# Altium PCB KUOZHAN.PCBDOC (part 10 of 21)
Units mm, origin at the board's own origin, x right, y up, seen from the top; angles counter-clockwise.
Board outline 165.51 x 116.38 mm, 2 copper layers (Top Layer, Bottom Layer); 171 components, 245 nets, 894 pads, 298 vias.
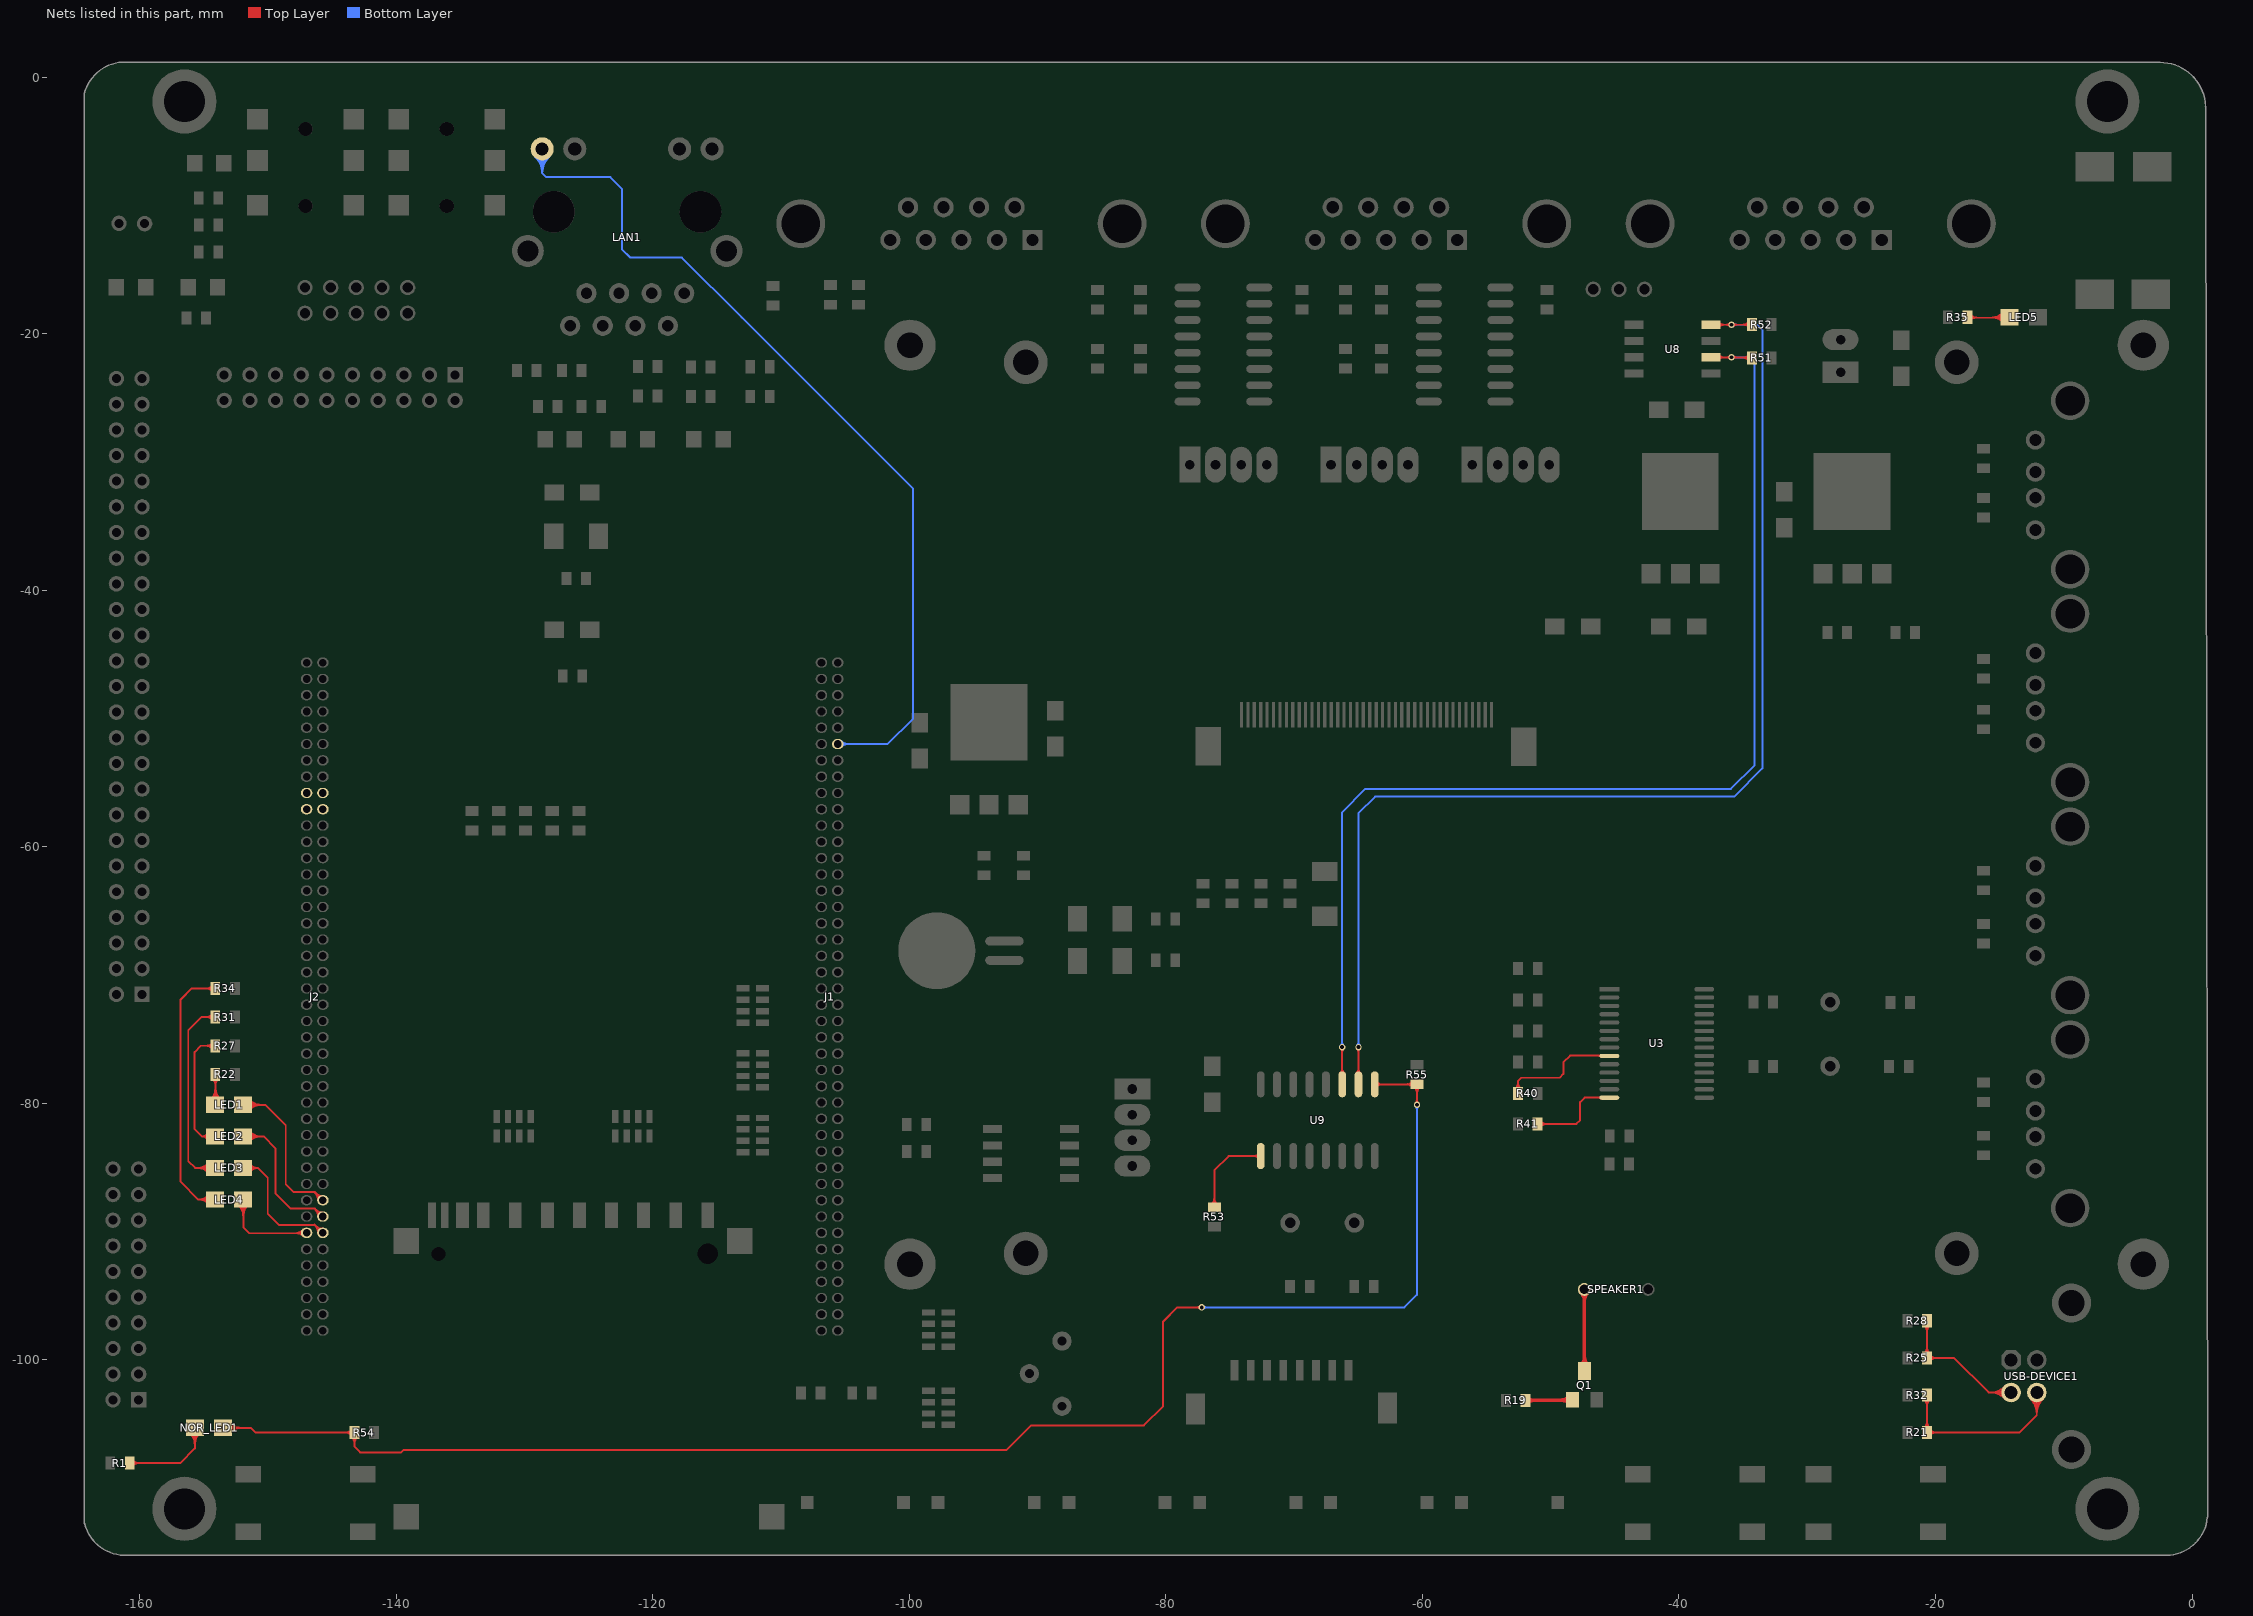
[diagram p10: the nets of this part, all layers, seen from the top]

## Via types
v1: diameter 0.5, hole 0.3, Top Layer to Bottom Layer, 272 vias
v2: diameter 0.6, hole 0.3, Top Layer to Bottom Layer, 24 vias
v3: diameter 0.9, hole 0.9, Top Layer to Bottom Layer, 2 vias

## Nets (pads, with @x,y where several pads share a name; then routed paths per layer and width w, separated by ;. In a path a pad name is that pad's centre, name@x,y a point inside that pad or via, vN(x,y) a via of type N, cw(c..) or ccw(c..) an arc to the next point about the centre after c; other vN are vias at no path point) (continued)
NetLED1_1: LED1.1 R22.1 | length 29.4
  Top Layer w0.15: LED1.1@-154.125,-80.11 -154.087,-80.073 R22.1@-154.087,-77.74 ; LED1.1@-154.456,-79.714 ccw(c-155.345,-78.825) -154.087,-78.825 ; LED1.1@-154.456,-79.714 ccw(c-155.345,-78.825) -154.087,-78.825 ; LED1.1@-154.456,-79.714 ccw(c-155.345,-78.825) -154.087,-78.825 ; LED1.1@-154.456,-79.714 ccw(c-155.345,-78.825) -154.087,-78.825 ; LED1.1@-154.456,-79.714 ccw(c-155.345,-78.825) -154.087,-78.825 ; LED1.1@-154.35,-79.82 ccw(c-154.983,-79.187) -154.087,-79.187 ; LED1.1@-154.35,-79.82 ccw(c-154.983,-79.187) -154.087,-79.187 ; LED1.1@-154.35,-79.82 ccw(c-154.983,-79.187) -154.087,-79.187 ; LED1.1@-154.35,-79.82 ccw(c-154.983,-79.187) -154.087,-79.187 ; LED1.1@-154.35,-79.82 ccw(c-154.983,-79.187) -154.087,-79.187 ; R22.1@-154.304,-78.084 cw(c-154.826,-78.606) -154.087,-78.606 ; R22.1@-154.304,-78.084 cw(c-154.826,-78.606) -154.087,-78.606 ; R22.1@-154.304,-78.084 cw(c-154.826,-78.606) -154.087,-78.606 ; R22.1@-154.304,-78.084 cw(c-154.826,-78.606) -154.087,-78.606 ; R22.1@-154.304,-78.084 cw(c-154.826,-78.606) -154.087,-78.606 ; -154.087,-79.416 ccw(c-153.365,-79.416) LED1.1@-153.876,-79.927 ; -154.087,-79.416 ccw(c-153.365,-79.416) LED1.1@-153.876,-79.927 ; -154.087,-79.416 ccw(c-153.365,-79.416) LED1.1@-153.876,-79.927 ; -154.087,-79.416 ccw(c-153.365,-79.416) LED1.1@-153.876,-79.927 ; -154.087,-79.416 ccw(c-153.365,-79.416) LED1.1@-153.876,-79.927 ; -154.087,-79.054 ccw(c-153.003,-79.054) LED1.1@-153.77,-79.82 ; -154.087,-79.054 ccw(c-153.003,-79.054) LED1.1@-153.77,-79.82 ; -154.087,-79.054 ccw(c-153.003,-79.054) LED1.1@-153.77,-79.82 ; -154.087,-79.054 ccw(c-153.003,-79.054) LED1.1@-153.77,-79.82 ; -154.087,-79.054 ccw(c-153.003,-79.054) LED1.1@-153.77,-79.82 ; -154.087,-78.692 ccw(c-152.641,-78.692) LED1.1@-153.664,-79.714 ; -154.087,-78.692 ccw(c-152.641,-78.692) LED1.1@-153.664,-79.714 ; -154.087,-78.692 ccw(c-152.641,-78.692) LED1.1@-153.664,-79.714 ; -154.087,-78.692 ccw(c-152.641,-78.692) LED1.1@-153.664,-79.714 ; -154.087,-78.692 ccw(c-152.641,-78.692) LED1.1@-153.664,-79.714 ; -154.087,-78.606 cw(c-153.349,-78.606) R22.1@-153.871,-78.084 ; -154.087,-78.606 cw(c-153.349,-78.606) R22.1@-153.871,-78.084 ; -154.087,-78.606 cw(c-153.349,-78.606) R22.1@-153.871,-78.084 ; -154.087,-78.606 cw(c-153.349,-78.606) R22.1@-153.871,-78.084 ; -154.087,-78.606 cw(c-153.349,-78.606) R22.1@-153.871,-78.084
NetLED2_1: LED2.1 R27.1 | length 24.9
  Top Layer w0.15: LED2.1@-154.125,-82.571 -155.129,-82.571 ; R27.1@-154.087,-75.507 -155.207,-75.507 -155.7,-76 -155.7,-82 -155.129,-82.571 ; -155.129,-82.571 cw(c-155.129,-83.079) LED2.1@-154.682,-82.837 ; -155.129,-82.571 ccw(c-155.129,-82.063) LED2.1@-154.682,-82.305 ; -155.129,-82.571 cw(c-155.129,-83.079) LED2.1@-154.682,-82.837 ; -155.129,-82.571 ccw(c-155.129,-82.063) LED2.1@-154.682,-82.305 ; -155.129,-82.571 cw(c-155.129,-83.079) LED2.1@-154.682,-82.837 ; -155.129,-82.571 ccw(c-155.129,-82.063) LED2.1@-154.682,-82.305 ; -155.129,-82.571 cw(c-155.129,-83.079) LED2.1@-154.682,-82.837 ; -155.129,-82.571 ccw(c-155.129,-82.063) LED2.1@-154.682,-82.305 ; -155.129,-82.571 ccw(c-155.129,-82.063) LED2.1@-154.682,-82.305 ; -155.129,-82.571 cw(c-155.129,-83.079) LED2.1@-154.682,-82.837 ; -154.877,-82.571 cw(c-154.877,-82.943) LED2.1@-154.55,-82.766 ; -154.877,-82.571 ccw(c-154.877,-82.199) LED2.1@-154.55,-82.376 ; -154.877,-82.571 cw(c-154.877,-82.943) LED2.1@-154.55,-82.766 ; -154.877,-82.571 ccw(c-154.877,-82.199) LED2.1@-154.55,-82.376 ; -154.877,-82.571 cw(c-154.877,-82.943) LED2.1@-154.55,-82.766 ; -154.877,-82.571 ccw(c-154.877,-82.199) LED2.1@-154.55,-82.376 ; -154.877,-82.571 cw(c-154.877,-82.943) LED2.1@-154.55,-82.766 ; -154.877,-82.571 ccw(c-154.877,-82.199) LED2.1@-154.55,-82.376 ; -154.877,-82.571 ccw(c-154.877,-82.199) LED2.1@-154.55,-82.376 ; -154.877,-82.571 cw(c-154.877,-82.943) LED2.1@-154.55,-82.766 ; -154.826,-75.507 cw(c-154.826,-76.246) R27.1@-154.304,-75.723 ; -154.826,-75.507 ccw(c-154.826,-74.768) R27.1@-154.304,-75.291 ; -154.826,-75.507 cw(c-154.826,-76.246) R27.1@-154.304,-75.723 ; -154.826,-75.507 ccw(c-154.826,-74.768) R27.1@-154.304,-75.291 ; -154.826,-75.507 cw(c-154.826,-76.246) R27.1@-154.304,-75.723 ; -154.826,-75.507 ccw(c-154.826,-74.768) R27.1@-154.304,-75.291 ; -154.826,-75.507 cw(c-154.826,-76.246) R27.1@-154.304,-75.723 ; -154.826,-75.507 ccw(c-154.826,-74.768) R27.1@-154.304,-75.291 ; -154.826,-75.507 ccw(c-154.826,-74.768) R27.1@-154.304,-75.291 ; -154.826,-75.507 cw(c-154.826,-76.246) R27.1@-154.304,-75.723
NetLED3_1: LED3.1 R31.1 | length 39.2
  Top Layer w0.15: LED3.1@-154.125,-85.031 -155.669,-85.031 -156.2,-84.5 -156.2,-74.3 -155.174,-73.274 R31.1@-154.087,-73.274 ; -155.542,-85.031 cw(c-155.542,-86.383) LED3.1@-154.586,-85.427 ; -155.542,-85.031 ccw(c-155.542,-83.68) LED3.1@-154.586,-84.635 ; -155.542,-85.031 cw(c-155.542,-86.383) LED3.1@-154.586,-85.427 ; -155.542,-85.031 ccw(c-155.542,-83.68) LED3.1@-154.586,-84.635 ; -155.542,-85.031 cw(c-155.542,-86.383) LED3.1@-154.586,-85.427 ; -155.542,-85.031 ccw(c-155.542,-83.68) LED3.1@-154.586,-84.635 ; -155.542,-85.031 cw(c-155.542,-86.383) LED3.1@-154.586,-85.427 ; -155.542,-85.031 ccw(c-155.542,-83.68) LED3.1@-154.586,-84.635 ; -155.542,-85.031 ccw(c-155.542,-83.68) LED3.1@-154.586,-84.635 ; -155.542,-85.031 cw(c-155.542,-86.383) LED3.1@-154.586,-85.427 ; -155.18,-85.031 cw(c-155.18,-86.021) LED3.1@-154.48,-85.321 ; -155.18,-85.031 ccw(c-155.18,-84.042) LED3.1@-154.48,-84.742 ; -155.18,-85.031 cw(c-155.18,-86.021) LED3.1@-154.48,-85.321 ; -155.18,-85.031 ccw(c-155.18,-84.042) LED3.1@-154.48,-84.742 ; -155.18,-85.031 cw(c-155.18,-86.021) LED3.1@-154.48,-85.321 ; -155.18,-85.031 ccw(c-155.18,-84.042) LED3.1@-154.48,-84.742 ; -155.18,-85.031 cw(c-155.18,-86.021) LED3.1@-154.48,-85.321 ; -155.18,-85.031 ccw(c-155.18,-84.042) LED3.1@-154.48,-84.742 ; -155.18,-85.031 ccw(c-155.18,-84.042) LED3.1@-154.48,-84.742 ; -155.18,-85.031 cw(c-155.18,-86.021) LED3.1@-154.48,-85.321 ; -154.826,-73.274 cw(c-154.826,-74.012) R31.1@-154.304,-73.49 ; -154.826,-73.274 ccw(c-154.826,-72.535) R31.1@-154.304,-73.057 ; -154.826,-73.274 cw(c-154.826,-74.012) R31.1@-154.304,-73.49 ; -154.826,-73.274 ccw(c-154.826,-72.535) R31.1@-154.304,-73.057 ; -154.826,-73.274 cw(c-154.826,-74.012) R31.1@-154.304,-73.49 ; -154.826,-73.274 ccw(c-154.826,-72.535) R31.1@-154.304,-73.057 ; -154.826,-73.274 cw(c-154.826,-74.012) R31.1@-154.304,-73.49 ; -154.826,-73.274 ccw(c-154.826,-72.535) R31.1@-154.304,-73.057 ; -154.826,-73.274 ccw(c-154.826,-72.535) R31.1@-154.304,-73.057 ; -154.826,-73.274 cw(c-154.826,-74.012) R31.1@-154.304,-73.49
NetLED4_1: LED4.1 R34.1 | length 41.9
  Top Layer w0.15: LED4.1@-154.125,-87.492 -155.408,-87.492 ; R34.1@-154.087,-71.04 -155.94,-71.04 -156.8,-71.9 -156.8,-86.1 -155.408,-87.492 ; -155.408,-87.492 cw(c-155.408,-88.537) LED4.1@-154.615,-87.857 ; -155.408,-87.492 ccw(c-155.408,-86.447) LED4.1@-154.615,-87.127 ; -155.408,-87.492 cw(c-155.408,-88.537) LED4.1@-154.615,-87.857 ; -155.408,-87.492 ccw(c-155.408,-86.447) LED4.1@-154.615,-87.127 ; -155.408,-87.492 cw(c-155.408,-88.537) LED4.1@-154.615,-87.857 ; -155.408,-87.492 ccw(c-155.408,-86.447) LED4.1@-154.615,-87.127 ; -155.408,-87.492 cw(c-155.408,-88.537) LED4.1@-154.615,-87.857 ; -155.408,-87.492 ccw(c-155.408,-86.447) LED4.1@-154.615,-87.127 ; -155.408,-87.492 ccw(c-155.408,-86.447) LED4.1@-154.615,-87.127 ; -155.408,-87.492 cw(c-155.408,-88.537) LED4.1@-154.615,-87.857 ; -155.082,-87.492 cw(c-155.082,-88.257) LED4.1@-154.501,-87.759 ; -155.082,-87.492 ccw(c-155.082,-86.727) LED4.1@-154.501,-87.225 ; -155.082,-87.492 cw(c-155.082,-88.257) LED4.1@-154.501,-87.759 ; -155.082,-87.492 ccw(c-155.082,-86.727) LED4.1@-154.501,-87.225 ; -155.082,-87.492 cw(c-155.082,-88.257) LED4.1@-154.501,-87.759 ; -155.082,-87.492 ccw(c-155.082,-86.727) LED4.1@-154.501,-87.225 ; -155.082,-87.492 cw(c-155.082,-88.257) LED4.1@-154.501,-87.759 ; -155.082,-87.492 ccw(c-155.082,-86.727) LED4.1@-154.501,-87.225 ; -155.082,-87.492 ccw(c-155.082,-86.727) LED4.1@-154.501,-87.225 ; -155.082,-87.492 cw(c-155.082,-88.257) LED4.1@-154.501,-87.759 ; -154.826,-71.04 cw(c-154.826,-71.779) R34.1@-154.304,-71.257 ; -154.826,-71.04 ccw(c-154.826,-70.302) R34.1@-154.304,-70.824 ; -154.826,-71.04 cw(c-154.826,-71.779) R34.1@-154.304,-71.257 ; -154.826,-71.04 ccw(c-154.826,-70.302) R34.1@-154.304,-70.824 ; -154.826,-71.04 cw(c-154.826,-71.779) R34.1@-154.304,-71.257 ; -154.826,-71.04 ccw(c-154.826,-70.302) R34.1@-154.304,-70.824 ; -154.826,-71.04 cw(c-154.826,-71.779) R34.1@-154.304,-71.257 ; -154.826,-71.04 ccw(c-154.826,-70.302) R34.1@-154.304,-70.824 ; -154.826,-71.04 ccw(c-154.826,-70.302) R34.1@-154.304,-70.824 ; -154.826,-71.04 cw(c-154.826,-71.779) R34.1@-154.304,-71.257
NetLED5_1: LED5.1 R35.1 | length 26.3
  Top Layer w0.15: R35.1@-17.513,-18.76 LED5.1@-14.274,-18.76 ; R35.1@-17.402,-18.609 ccw(c-17.038,-18.245) -17.038,-18.76 ; R35.1@-17.296,-18.936 cw(c-16.871,-19.36) -16.871,-18.76 ; R35.1@-17.296,-18.503 ccw(c-16.676,-17.883) -16.676,-18.76 ; -15.76,-18.76 ccw(c-15.76,-17.24) LED5.1@-14.686,-18.314 ; -15.76,-18.76 ccw(c-15.76,-17.24) LED5.1@-14.686,-18.314 ; -15.76,-18.76 ccw(c-15.76,-17.24) LED5.1@-14.686,-18.314 ; -15.76,-18.76 ccw(c-15.76,-17.24) LED5.1@-14.686,-18.314 ; -15.76,-18.76 ccw(c-15.76,-17.24) LED5.1@-14.686,-18.314 ; -15.523,-18.76 cw(c-15.523,-19.944) LED5.1@-14.686,-19.106 ; -15.523,-18.76 cw(c-15.523,-19.944) LED5.1@-14.686,-19.106 ; -15.523,-18.76 cw(c-15.523,-19.944) LED5.1@-14.686,-19.106 ; -15.523,-18.76 cw(c-15.523,-19.944) LED5.1@-14.686,-19.106 ; -15.523,-18.76 cw(c-15.523,-19.944) LED5.1@-14.686,-19.106 ; -15.398,-18.76 ccw(c-15.398,-17.602) LED5.1@-14.58,-18.42 ; -15.398,-18.76 ccw(c-15.398,-17.602) LED5.1@-14.58,-18.42 ; -15.398,-18.76 ccw(c-15.398,-17.602) LED5.1@-14.58,-18.42 ; -15.398,-18.76 ccw(c-15.398,-17.602) LED5.1@-14.58,-18.42 ; -15.398,-18.76 ccw(c-15.398,-17.602) LED5.1@-14.58,-18.42 ; -15.161,-18.76 cw(c-15.161,-19.581) LED5.1@-14.58,-19 ; -15.161,-18.76 cw(c-15.161,-19.581) LED5.1@-14.58,-19 ; -15.161,-18.76 cw(c-15.161,-19.581) LED5.1@-14.58,-19 ; -15.161,-18.76 cw(c-15.161,-19.581) LED5.1@-14.58,-19 ; -15.161,-18.76 cw(c-15.161,-19.581) LED5.1@-14.58,-19 ; -15.036,-18.76 ccw(c-15.036,-17.964) LED5.1@-14.474,-18.527 ; -15.036,-18.76 ccw(c-15.036,-17.964) LED5.1@-14.474,-18.527 ; -15.036,-18.76 ccw(c-15.036,-17.964) LED5.1@-14.474,-18.527 ; -15.036,-18.76 ccw(c-15.036,-17.964) LED5.1@-14.474,-18.527 ; -15.036,-18.76 ccw(c-15.036,-17.964) LED5.1@-14.474,-18.527
NETLINK: J1.12 LAN1.12 | length 113.5
  Bottom Layer w0.15: LAN1.12@-128.608,-5.594 -128.608,-7.492 ; J1.12@-105.571,-51.993 -101.693,-51.993 -99.7,-50 -99.7,-32.1 -113.066,-18.734 -117.725,-14.075 -121.725,-14.075 -122.4,-13.4 -122.4,-8.7 -123.3,-7.8 -128.3,-7.8 -128.608,-7.492 ; LAN1.12@-129.171,-6.197 cw(c-130.379,-7.492) -128.608,-7.492 ; LAN1.12@-129.171,-6.197 cw(c-130.379,-7.492) -128.608,-7.492 ; LAN1.12@-129.171,-6.197 cw(c-130.379,-7.492) -128.608,-7.492 ; LAN1.12@-129.171,-6.197 cw(c-130.379,-7.492) -128.608,-7.492 ; LAN1.12@-129.171,-6.197 cw(c-130.379,-7.492) -128.608,-7.492 ; LAN1.12@-129.068,-6.087 cw(c-130.057,-7.147) -128.608,-7.147 ; LAN1.12@-129.068,-6.087 cw(c-130.057,-7.147) -128.608,-7.147 ; LAN1.12@-129.068,-6.087 cw(c-130.057,-7.147) -128.608,-7.147 ; LAN1.12@-129.068,-6.087 cw(c-130.057,-7.147) -128.608,-7.147 ; LAN1.12@-129.068,-6.087 cw(c-130.057,-7.147) -128.608,-7.147 ; LAN1.12@-128.966,-5.978 cw(c-129.735,-6.802) -128.608,-6.802 ; LAN1.12@-128.966,-5.978 cw(c-129.735,-6.802) -128.608,-6.802 ; LAN1.12@-128.966,-5.978 cw(c-129.735,-6.802) -128.608,-6.802 ; LAN1.12@-128.966,-5.978 cw(c-129.735,-6.802) -128.608,-6.802 ; LAN1.12@-128.966,-5.978 cw(c-129.735,-6.802) -128.608,-6.802 ; -128.608,-7.492 cw(c-126.837,-7.492) LAN1.12@-128.045,-6.197 ; -128.608,-7.492 cw(c-126.837,-7.492) LAN1.12@-128.045,-6.197 ; -128.608,-7.492 cw(c-126.837,-7.492) LAN1.12@-128.045,-6.197 ; -128.608,-7.492 cw(c-126.837,-7.492) LAN1.12@-128.045,-6.197 ; -128.608,-7.492 cw(c-126.837,-7.492) LAN1.12@-128.045,-6.197 ; -128.608,-7.147 cw(c-127.159,-7.147) LAN1.12@-128.148,-6.087 ; -128.608,-7.147 cw(c-127.159,-7.147) LAN1.12@-128.148,-6.087 ; -128.608,-7.147 cw(c-127.159,-7.147) LAN1.12@-128.148,-6.087 ; -128.608,-7.147 cw(c-127.159,-7.147) LAN1.12@-128.148,-6.087 ; -128.608,-7.147 cw(c-127.159,-7.147) LAN1.12@-128.148,-6.087 ; -128.608,-6.802 cw(c-127.481,-6.802) LAN1.12@-128.25,-5.978 ; -128.608,-6.802 cw(c-127.481,-6.802) LAN1.12@-128.25,-5.978 ; -128.608,-6.802 cw(c-127.481,-6.802) LAN1.12@-128.25,-5.978 ; -128.608,-6.802 cw(c-127.481,-6.802) LAN1.12@-128.25,-5.978 ; -128.608,-6.802 cw(c-127.481,-6.802) LAN1.12@-128.25,-5.978 ; J1.12@-105.447,-52.117 cw(c-105.148,-52.415) J1.12@-105.148,-51.993 ; J1.12@-105.447,-52.117 cw(c-105.148,-52.415) J1.12@-105.148,-51.993 ; J1.12@-105.447,-52.117 cw(c-105.148,-52.415) J1.12@-105.148,-51.993 ; J1.12@-105.447,-51.869 ccw(c-105.148,-51.57) J1.12@-105.148,-51.993 ; J1.12@-105.447,-51.869 ccw(c-105.148,-51.57) J1.12@-105.148,-51.993 ; J1.12@-105.447,-51.869 ccw(c-105.148,-51.57) J1.12@-105.148,-51.993 ; J1.12@-105.341,-52.223 cw(c-104.786,-52.777) -104.786,-51.993 ; J1.12@-105.341,-52.223 cw(c-104.786,-52.777) -104.786,-51.993 ; J1.12@-105.341,-52.223 cw(c-104.786,-52.777) -104.786,-51.993 ; J1.12@-105.341,-51.763 ccw(c-104.786,-51.208) -104.786,-51.993 ; J1.12@-105.341,-51.763 ccw(c-104.786,-51.208) -104.786,-51.993 ; J1.12@-105.341,-51.763 ccw(c-104.786,-51.208) -104.786,-51.993 ; J1.12@-105.397,-52.113 cw(c-105.107,-52.404) -105.107,-51.993 ccw(c-105.107,-52.404) J1.12@-105.397,-52.113 ; J1.12@-105.397,-51.866 ccw(c-105.09,-51.559) -105.09,-51.993 cw(c-105.09,-51.559) J1.12@-105.397,-51.866 ; J1.12@-105.291,-52.219 cw(c-104.744,-52.766) -104.744,-51.993 ccw(c-104.744,-52.766) J1.12@-105.291,-52.219 ; J1.12@-105.291,-51.76 ccw(c-104.728,-51.197) -104.728,-51.993 cw(c-104.728,-51.197) J1.12@-105.291,-51.76
NetNOR_LED1_1: NOR_LED1.1 R54.2 R55.1 U9.9 | length 135.6
  Top Layer w0.15: NOR_LED1.1@-153.475,-105.29 -151.31,-105.29 -150.94,-105.66 -146.5,-105.66 R54.2@-143.237,-105.66 -143.237,-106.763 -142.8,-107.2 -139.6,-107.2 -139.4,-107 -92.4,-107 -90.5,-105.1 -81.7,-105.1 -80.2,-103.6 -80.2,-97 -79.1,-95.9 v1(-77.2,-95.9) ; NOR_LED1.1@-153.12,-105.58 cw(c-152.42,-106.279) -152.42,-105.29 cw(c-152.42,-104.3) NOR_LED1.1@-153.12,-105 ; NOR_LED1.1@-153.014,-105.686 cw(c-152.058,-106.642) -152.058,-105.29 cw(c-152.058,-103.938) NOR_LED1.1@-153.014,-104.894 ; R54.2@-143.453,-106.003 cw(c-143.975,-106.525) -143.237,-106.525 cw(c-142.498,-106.525) R54.2@-143.02,-106.003 ; R54.2@-143.453,-105.876 ccw(c-143.975,-106.398) -143.975,-105.66 ccw(c-143.975,-104.921) R54.2@-143.453,-105.443 ; v1@-77.324,-96.024 ccw(c-77.622,-96.322) -77.622,-95.9 ccw(c-77.622,-95.478) v1@-77.324,-95.776 ; U9.9@-63.71,-78.512 -60.419,-78.512 v1(-60.419,-80.1) ; U9.9@-63.548,-78.674 cw(c-63.155,-79.067) -63.155,-78.512 cw(c-63.155,-77.957) U9.9@-63.548,-78.35 ; -61.288,-78.512 ccw(c-61.288,-77.766) R55.1@-60.76,-78.293 ; -61.277,-78.512 cw(c-61.277,-79.243) R55.1@-60.76,-78.726 ; -60.925,-78.512 ccw(c-60.925,-78.128) R55.1@-60.654,-78.4 ; R55.1@-60.633,-78.726 cw(c-61.15,-79.243) -60.419,-79.243 ; v1@-60.542,-79.976 ccw(c-60.841,-79.678) -60.419,-79.678 ccw(c-59.996,-79.678) v1@-60.295,-79.976 ; -60.419,-79.254 cw(c-59.673,-79.254) R55.1@-60.2,-78.726 ; -60.419,-78.892 cw(c-60.035,-78.892) R55.1@-60.306,-78.62
  Bottom Layer w0.15: v1(-77.2,-95.9) -61.4,-95.9 -60.419,-94.919 v1(-60.419,-80.1) ; v1@-77.076,-96.024 cw(c-76.778,-96.322) -76.778,-95.9 cw(c-76.778,-95.478) v1@-77.076,-95.776 ; v1@-60.542,-80.224 cw(c-60.841,-80.522) -60.419,-80.522 cw(c-59.996,-80.522) v1@-60.295,-80.224
NetNOR_LED1_2: NOR_LED1.2 R1.2 | length 12
  Top Layer w0.15: R1.2@-160.763,-108.04 -156.84,-108.04 -155.685,-106.885 NOR_LED1.2@-155.685,-105.29 ; R1.2@-160.547,-108.257 cw(c-160.025,-108.779) -160.025,-108.04 cw(c-160.025,-107.302) R1.2@-160.547,-107.824 ; NOR_LED1.2@-156.081,-105.686 cw(c-157.037,-106.642) -155.685,-106.642 cw(c-154.333,-106.642) NOR_LED1.2@-155.289,-105.686 ; NOR_LED1.2@-155.975,-105.58 cw(c-156.675,-106.279) -155.685,-106.279 cw(c-154.695,-106.279) NOR_LED1.2@-155.395,-105.58
NetQ1_B: Q1.B R19.2 | length 14.7
  Top Layer w0.3: R19.2@-51.963,-103.14 -48.338,-103.14 Q1.B@-48.306,-103.108 ; R19.2@-51.8,-103.304 cw(c-51.406,-103.698) -51.406,-103.14 ; R19.2@-51.8,-103.304 cw(c-51.406,-103.698) -51.406,-103.14 ; R19.2@-51.8,-103.304 cw(c-51.406,-103.698) -51.406,-103.14 ; R19.2@-51.8,-103.304 cw(c-51.406,-103.698) -51.406,-103.14 ; R19.2@-51.8,-103.304 cw(c-51.406,-103.698) -51.406,-103.14 ; R19.2@-51.8,-102.977 ccw(c-51.406,-102.583) -51.406,-103.14 ; R19.2@-51.8,-102.977 ccw(c-51.406,-102.583) -51.406,-103.14 ; R19.2@-51.8,-102.977 ccw(c-51.406,-102.583) -51.406,-103.14 ; R19.2@-51.8,-102.977 ccw(c-51.406,-102.583) -51.406,-103.14 ; R19.2@-51.8,-102.977 ccw(c-51.406,-102.583) -51.406,-103.14 ; -49.229,-103.14 ccw(c-49.229,-102.184) Q1.B@-48.553,-102.86 ; -49.229,-103.14 ccw(c-49.229,-102.184) Q1.B@-48.553,-102.86 ; -49.229,-103.14 ccw(c-49.229,-102.184) Q1.B@-48.553,-102.86 ; -49.229,-103.14 ccw(c-49.229,-102.184) Q1.B@-48.553,-102.86 ; -49.229,-103.14 ccw(c-49.229,-102.184) Q1.B@-48.553,-102.86 ; -49.072,-103.14 cw(c-49.072,-103.874) Q1.B@-48.553,-103.355 ; -49.072,-103.14 cw(c-49.072,-103.874) Q1.B@-48.553,-103.355 ; -49.072,-103.14 cw(c-49.072,-103.874) Q1.B@-48.553,-103.355 ; -49.072,-103.14 cw(c-49.072,-103.874) Q1.B@-48.553,-103.355 ; -49.072,-103.14 cw(c-49.072,-103.874) Q1.B@-48.553,-103.355
NetQ1_C: Q1.C SPEAKER1.2 | length 19.6
  Top Layer w0.3: SPEAKER1.2@-47.375,-94.5 -47.375,-100.822 Q1.C@-47.356,-100.842 ; SPEAKER1.2@-47.622,-94.747 cw(c-48.22,-95.345) -47.375,-95.345 ; SPEAKER1.2@-47.622,-94.747 cw(c-48.22,-95.345) -47.375,-95.345 ; SPEAKER1.2@-47.622,-94.747 cw(c-48.22,-95.345) -47.375,-95.345 ; SPEAKER1.2@-47.622,-94.747 cw(c-48.22,-95.345) -47.375,-95.345 ; SPEAKER1.2@-47.622,-94.747 cw(c-48.22,-95.345) -47.375,-95.345 ; Q1.C@-47.603,-100.394 ccw(c-48.153,-99.844) -47.375,-99.844 ; Q1.C@-47.603,-100.394 ccw(c-48.153,-99.844) -47.375,-99.844 ; Q1.C@-47.603,-100.394 ccw(c-48.153,-99.844) -47.375,-99.844 ; Q1.C@-47.603,-100.394 ccw(c-48.153,-99.844) -47.375,-99.844 ; Q1.C@-47.603,-100.394 ccw(c-48.153,-99.844) -47.375,-99.844 ; -47.375,-99.75 ccw(c-46.464,-99.75) Q1.C@-47.108,-100.394 ; -47.375,-99.75 ccw(c-46.464,-99.75) Q1.C@-47.108,-100.394 ; -47.375,-99.75 ccw(c-46.464,-99.75) Q1.C@-47.108,-100.394 ; -47.375,-99.75 ccw(c-46.464,-99.75) Q1.C@-47.108,-100.394 ; -47.375,-99.75 ccw(c-46.464,-99.75) Q1.C@-47.108,-100.394 ; -47.375,-95.345 cw(c-46.53,-95.345) SPEAKER1.2@-47.128,-94.747 ; -47.375,-95.345 cw(c-46.53,-95.345) SPEAKER1.2@-47.128,-94.747 ; -47.375,-95.345 cw(c-46.53,-95.345) SPEAKER1.2@-47.128,-94.747 ; -47.375,-95.345 cw(c-46.53,-95.345) SPEAKER1.2@-47.128,-94.747 ; -47.375,-95.345 cw(c-46.53,-95.345) SPEAKER1.2@-47.128,-94.747
NetR21_2: R21.2 R32.2 USB-DEVICE1.3 | length 61.7
  Top Layer w0.15: R32.2@-20.663,-102.74 R21.2@-20.663,-105.64 -13.44,-105.64 -12.104,-104.304 USB-DEVICE1.3@-12.104,-102.534 ; R21.2@-20.88,-105.297 ccw(c-21.402,-104.775) -20.663,-104.775 ; R21.2@-20.88,-105.297 ccw(c-21.402,-104.775) -20.663,-104.775 ; R21.2@-20.88,-105.297 ccw(c-21.402,-104.775) -20.663,-104.775 ; R21.2@-20.88,-105.297 ccw(c-21.402,-104.775) -20.663,-104.775 ; R21.2@-20.88,-105.297 ccw(c-21.402,-104.775) -20.663,-104.775 ; R32.2@-20.88,-103.084 cw(c-21.402,-103.606) -20.663,-103.606 ; R32.2@-20.88,-103.084 cw(c-21.402,-103.606) -20.663,-103.606 ; R32.2@-20.88,-103.084 cw(c-21.402,-103.606) -20.663,-103.606 ; R32.2@-20.88,-103.084 cw(c-21.402,-103.606) -20.663,-103.606 ; R32.2@-20.88,-103.084 cw(c-21.402,-103.606) -20.663,-103.606 ; -20.663,-104.775 ccw(c-19.925,-104.775) R21.2@-20.447,-105.297 ; -20.663,-104.775 ccw(c-19.925,-104.775) R21.2@-20.447,-105.297 ; -20.663,-104.775 ccw(c-19.925,-104.775) R21.2@-20.447,-105.297 ; -20.663,-104.775 ccw(c-19.925,-104.775) R21.2@-20.447,-105.297 ; -20.663,-104.775 ccw(c-19.925,-104.775) R21.2@-20.447,-105.297 ; -20.663,-103.606 cw(c-19.925,-103.606) R32.2@-20.447,-103.084 ; -20.663,-103.606 cw(c-19.925,-103.606) R32.2@-20.447,-103.084 ; -20.663,-103.606 cw(c-19.925,-103.606) R32.2@-20.447,-103.084 ; -20.663,-103.606 cw(c-19.925,-103.606) R32.2@-20.447,-103.084 ; -20.663,-103.606 cw(c-19.925,-103.606) R32.2@-20.447,-103.084 ; R21.2@-20.447,-105.857 cw(c-19.925,-106.379) -19.925,-105.64 ; R21.2@-20.447,-105.857 cw(c-19.925,-106.379) -19.925,-105.64 ; R21.2@-20.447,-105.857 cw(c-19.925,-106.379) -19.925,-105.64 ; R21.2@-20.447,-105.857 cw(c-19.925,-106.379) -19.925,-105.64 ; R21.2@-20.447,-105.857 cw(c-19.925,-106.379) -19.925,-105.64 ; R21.2@-20.447,-105.424 ccw(c-19.925,-104.902) -19.925,-105.64 ; R21.2@-20.447,-105.424 ccw(c-19.925,-104.902) -19.925,-105.64 ; R21.2@-20.447,-105.424 ccw(c-19.925,-104.902) -19.925,-105.64 ; R21.2@-20.447,-105.424 ccw(c-19.925,-104.902) -19.925,-105.64 ; R21.2@-20.447,-105.424 ccw(c-19.925,-104.902) -19.925,-105.64 ; USB-DEVICE1.3@-12.59,-103.02 cw(c-13.763,-104.192) -12.104,-104.192 ; USB-DEVICE1.3@-12.59,-103.02 cw(c-13.763,-104.192) -12.104,-104.192 ; USB-DEVICE1.3@-12.59,-103.02 cw(c-13.763,-104.192) -12.104,-104.192 ; USB-DEVICE1.3@-12.59,-103.02 cw(c-13.763,-104.192) -12.104,-104.192 ; USB-DEVICE1.3@-12.59,-103.02 cw(c-13.763,-104.192) -12.104,-104.192 ; USB-DEVICE1.3@-12.484,-102.914 cw(c-13.401,-103.83) -12.104,-103.83 ; USB-DEVICE1.3@-12.484,-102.914 cw(c-13.401,-103.83) -12.104,-103.83 ; USB-DEVICE1.3@-12.484,-102.914 cw(c-13.401,-103.83) -12.104,-103.83 ; USB-DEVICE1.3@-12.484,-102.914 cw(c-13.401,-103.83) -12.104,-103.83 ; USB-DEVICE1.3@-12.484,-102.914 cw(c-13.401,-103.83) -12.104,-103.83 ; USB-DEVICE1.3@-12.378,-102.807 cw(c-13.039,-103.468) -12.104,-103.468 ; USB-DEVICE1.3@-12.378,-102.807 cw(c-13.039,-103.468) -12.104,-103.468 ; USB-DEVICE1.3@-12.378,-102.807 cw(c-13.039,-103.468) -12.104,-103.468 ; USB-DEVICE1.3@-12.378,-102.807 cw(c-13.039,-103.468) -12.104,-103.468 ; USB-DEVICE1.3@-12.378,-102.807 cw(c-13.039,-103.468) -12.104,-103.468 ; -12.104,-104.192 cw(c-10.446,-104.192) USB-DEVICE1.3@-11.619,-103.02 ; -12.104,-104.192 cw(c-10.446,-104.192) USB-DEVICE1.3@-11.619,-103.02 ; -12.104,-104.192 cw(c-10.446,-104.192) USB-DEVICE1.3@-11.619,-103.02 ; -12.104,-104.192 cw(c-10.446,-104.192) USB-DEVICE1.3@-11.619,-103.02 ; -12.104,-104.192 cw(c-10.446,-104.192) USB-DEVICE1.3@-11.619,-103.02 ; -12.104,-103.83 cw(c-10.808,-103.83) USB-DEVICE1.3@-11.725,-102.914 ; -12.104,-103.83 cw(c-10.808,-103.83) USB-DEVICE1.3@-11.725,-102.914 ; -12.104,-103.83 cw(c-10.808,-103.83) USB-DEVICE1.3@-11.725,-102.914 ; -12.104,-103.83 cw(c-10.808,-103.83) USB-DEVICE1.3@-11.725,-102.914 ; -12.104,-103.83 cw(c-10.808,-103.83) USB-DEVICE1.3@-11.725,-102.914 ; -12.104,-103.468 cw(c-11.17,-103.468) USB-DEVICE1.3@-11.831,-102.807 ; -12.104,-103.468 cw(c-11.17,-103.468) USB-DEVICE1.3@-11.831,-102.807 ; -12.104,-103.468 cw(c-11.17,-103.468) USB-DEVICE1.3@-11.831,-102.807 ; -12.104,-103.468 cw(c-11.17,-103.468) USB-DEVICE1.3@-11.831,-102.807 ; -12.104,-103.468 cw(c-11.17,-103.468) USB-DEVICE1.3@-11.831,-102.807
NetR25_1: R25.1 R28.2 USB-DEVICE1.2 | length 58.5
  Top Layer w0.15: R28.2@-20.663,-96.94 R25.1@-20.663,-99.841 -18.559,-99.841 -15.866,-102.534 USB-DEVICE1.2@-14.104,-102.534 ; R25.1@-20.88,-99.498 ccw(c-21.402,-98.976) -20.663,-98.976 ; R25.1@-20.88,-99.498 ccw(c-21.402,-98.976) -20.663,-98.976 ; R25.1@-20.88,-99.498 ccw(c-21.402,-98.976) -20.663,-98.976 ; R25.1@-20.88,-99.498 ccw(c-21.402,-98.976) -20.663,-98.976 ; R25.1@-20.88,-99.498 ccw(c-21.402,-98.976) -20.663,-98.976 ; R28.2@-20.88,-97.284 cw(c-21.402,-97.806) -20.663,-97.806 ; R28.2@-20.88,-97.284 cw(c-21.402,-97.806) -20.663,-97.806 ; R28.2@-20.88,-97.284 cw(c-21.402,-97.806) -20.663,-97.806 ; R28.2@-20.88,-97.284 cw(c-21.402,-97.806) -20.663,-97.806 ; R28.2@-20.88,-97.284 cw(c-21.402,-97.806) -20.663,-97.806 ; -20.663,-98.976 ccw(c-19.925,-98.976) R25.1@-20.447,-99.498 ; -20.663,-98.976 ccw(c-19.925,-98.976) R25.1@-20.447,-99.498 ; -20.663,-98.976 ccw(c-19.925,-98.976) R25.1@-20.447,-99.498 ; -20.663,-98.976 ccw(c-19.925,-98.976) R25.1@-20.447,-99.498 ; -20.663,-98.976 ccw(c-19.925,-98.976) R25.1@-20.447,-99.498 ; -20.663,-97.806 cw(c-19.925,-97.806) R28.2@-20.447,-97.284 ; -20.663,-97.806 cw(c-19.925,-97.806) R28.2@-20.447,-97.284 ; -20.663,-97.806 cw(c-19.925,-97.806) R28.2@-20.447,-97.284 ; -20.663,-97.806 cw(c-19.925,-97.806) R28.2@-20.447,-97.284 ; -20.663,-97.806 cw(c-19.925,-97.806) R28.2@-20.447,-97.284 ; R25.1@-20.447,-100.058 cw(c-19.925,-100.58) -19.925,-99.841 ; R25.1@-20.447,-100.058 cw(c-19.925,-100.58) -19.925,-99.841 ; R25.1@-20.447,-100.058 cw(c-19.925,-100.58) -19.925,-99.841 ; R25.1@-20.447,-100.058 cw(c-19.925,-100.58) -19.925,-99.841 ; R25.1@-20.447,-100.058 cw(c-19.925,-100.58) -19.925,-99.841 ; R25.1@-20.447,-99.625 ccw(c-19.925,-99.103) -19.925,-99.841 ; R25.1@-20.447,-99.625 ccw(c-19.925,-99.103) -19.925,-99.841 ; R25.1@-20.447,-99.625 ccw(c-19.925,-99.103) -19.925,-99.841 ; R25.1@-20.447,-99.625 ccw(c-19.925,-99.103) -19.925,-99.841 ; R25.1@-20.447,-99.625 ccw(c-19.925,-99.103) -19.925,-99.841 ; -15.763,-102.534 cw(c-15.763,-104.192) USB-DEVICE1.2@-14.59,-103.02 ; -15.763,-102.534 ccw(c-15.763,-100.875) USB-DEVICE1.2@-14.59,-102.048 ; -15.763,-102.534 cw(c-15.763,-104.192) USB-DEVICE1.2@-14.59,-103.02 ; -15.763,-102.534 ccw(c-15.763,-100.875) USB-DEVICE1.2@-14.59,-102.048 ; -15.763,-102.534 cw(c-15.763,-104.192) USB-DEVICE1.2@-14.59,-103.02 ; -15.763,-102.534 ccw(c-15.763,-100.875) USB-DEVICE1.2@-14.59,-102.048 ; -15.763,-102.534 cw(c-15.763,-104.192) USB-DEVICE1.2@-14.59,-103.02 ; -15.763,-102.534 ccw(c-15.763,-100.875) USB-DEVICE1.2@-14.59,-102.048 ; -15.763,-102.534 ccw(c-15.763,-100.875) USB-DEVICE1.2@-14.59,-102.048 ; -15.763,-102.534 cw(c-15.763,-104.192) USB-DEVICE1.2@-14.59,-103.02 ; -15.401,-102.534 cw(c-15.401,-103.83) USB-DEVICE1.2@-14.484,-102.914 ; -15.401,-102.534 ccw(c-15.401,-101.237) USB-DEVICE1.2@-14.484,-102.154 ; -15.401,-102.534 cw(c-15.401,-103.83) USB-DEVICE1.2@-14.484,-102.914 ; -15.401,-102.534 ccw(c-15.401,-101.237) USB-DEVICE1.2@-14.484,-102.154 ; -15.401,-102.534 cw(c-15.401,-103.83) USB-DEVICE1.2@-14.484,-102.914 ; -15.401,-102.534 ccw(c-15.401,-101.237) USB-DEVICE1.2@-14.484,-102.154 ; -15.401,-102.534 cw(c-15.401,-103.83) USB-DEVICE1.2@-14.484,-102.914 ; -15.401,-102.534 ccw(c-15.401,-101.237) USB-DEVICE1.2@-14.484,-102.154 ; -15.401,-102.534 ccw(c-15.401,-101.237) USB-DEVICE1.2@-14.484,-102.154 ; -15.401,-102.534 cw(c-15.401,-103.83) USB-DEVICE1.2@-14.484,-102.914 ; -15.039,-102.534 cw(c-15.039,-103.468) USB-DEVICE1.2@-14.378,-102.807 ; -15.039,-102.534 ccw(c-15.039,-101.599) USB-DEVICE1.2@-14.378,-102.26 ; -15.039,-102.534 cw(c-15.039,-103.468) USB-DEVICE1.2@-14.378,-102.807 ; -15.039,-102.534 ccw(c-15.039,-101.599) USB-DEVICE1.2@-14.378,-102.26 ; -15.039,-102.534 cw(c-15.039,-103.468) USB-DEVICE1.2@-14.378,-102.807 ; -15.039,-102.534 ccw(c-15.039,-101.599) USB-DEVICE1.2@-14.378,-102.26 ; -15.039,-102.534 cw(c-15.039,-103.468) USB-DEVICE1.2@-14.378,-102.807 ; -15.039,-102.534 ccw(c-15.039,-101.599) USB-DEVICE1.2@-14.378,-102.26 ; -15.039,-102.534 ccw(c-15.039,-101.599) USB-DEVICE1.2@-14.378,-102.26 ; -15.039,-102.534 cw(c-15.039,-103.468) USB-DEVICE1.2@-14.378,-102.807
NetR40_1: R40.1 U3.9 | length 16.5
  Top Layer w0.15: R40.1@-52.537,-79.212 -52.537,-78.237 -52.3,-78 -49.3,-78 -49,-77.7 -49,-76.8 -48.475,-76.275 -45.375,-76.275 U3.9@-45.35,-76.3 ; -46.313,-76.275 cw(c-46.313,-76.578) U3.9@-46.099,-76.364 ; -46.258,-76.275 cw(c-46.258,-76.578) U3.9@-46.044,-76.364 ; R40.1@-52.753,-78.869 ccw(c-53.275,-78.346) -52.537,-78.346 ; R40.1@-52.753,-78.869 ccw(c-53.275,-78.346) -52.537,-78.346 ; R40.1@-52.753,-78.869 ccw(c-53.275,-78.346) -52.537,-78.346 ; R40.1@-52.753,-78.869 ccw(c-53.275,-78.346) -52.537,-78.346 ; R40.1@-52.753,-78.869 ccw(c-53.275,-78.346) -52.537,-78.346 ; -52.537,-78.346 ccw(c-51.798,-78.346) R40.1@-52.32,-78.869 ; -52.537,-78.346 ccw(c-51.798,-78.346) R40.1@-52.32,-78.869 ; -52.537,-78.346 ccw(c-51.798,-78.346) R40.1@-52.32,-78.869 ; -52.537,-78.346 ccw(c-51.798,-78.346) R40.1@-52.32,-78.869 ; -52.537,-78.346 ccw(c-51.798,-78.346) R40.1@-52.32,-78.869 ; U3.9@-46.113,-76.275 cw(c-46.113,-76.578) U3.9@-45.899,-76.364 ; U3.9@-46.113,-76.275 cw(c-46.113,-76.578) U3.9@-45.899,-76.364 ; U3.9@-46.113,-76.275 cw(c-46.113,-76.578) U3.9@-45.899,-76.364
NetR41_1: R41.1 U3.14 | length 14.9
  Top Layer w0.15: R41.1@-51.025,-81.6 -48,-81.6 -47.7,-81.3 -47.7,-79.9 -47.35,-79.55 U3.14@-45.35,-79.55 ; U3.14@-46.099,-79.614 ccw(c-46.252,-79.767) -46.252,-79.55 ccw(c-46.252,-79.333) U3.14@-46.099,-79.486 ; U3.14@-46.044,-79.614 ccw(c-46.197,-79.767) -46.197,-79.55 ccw(c-46.197,-79.333) U3.14@-46.044,-79.486 ; R41.1@-50.809,-81.816 cw(c-50.286,-82.339) -50.286,-81.6 ; R41.1@-50.809,-81.816 cw(c-50.286,-82.339) -50.286,-81.6 ; R41.1@-50.809,-81.816 cw(c-50.286,-82.339) -50.286,-81.6 ; R41.1@-50.809,-81.816 cw(c-50.286,-82.339) -50.286,-81.6 ; R41.1@-50.809,-81.816 cw(c-50.286,-82.339) -50.286,-81.6 ; R41.1@-50.809,-81.384 ccw(c-50.286,-80.861) -50.286,-81.6 ; R41.1@-50.809,-81.384 ccw(c-50.286,-80.861) -50.286,-81.6 ; R41.1@-50.809,-81.384 ccw(c-50.286,-80.861) -50.286,-81.6 ; R41.1@-50.809,-81.384 ccw(c-50.286,-80.861) -50.286,-81.6 ; R41.1@-50.809,-81.384 ccw(c-50.286,-80.861) -50.286,-81.6 ; U3.14@-46.052,-79.55 cw(c-46.052,-79.767) U3.14@-45.899,-79.614 ; U3.14@-46.052,-79.55 ccw(c-46.052,-79.333) U3.14@-45.899,-79.486 ; U3.14@-46.052,-79.55 cw(c-46.052,-79.767) U3.14@-45.899,-79.614 ; U3.14@-46.052,-79.55 ccw(c-46.052,-79.333) U3.14@-45.899,-79.486 ; U3.14@-46.052,-79.55 cw(c-46.052,-79.767) U3.14@-45.899,-79.614 ; U3.14@-46.052,-79.55 ccw(c-46.052,-79.333) U3.14@-45.899,-79.486
NetR51_1: R51.1 U8.2 U9.11 | length 98.3
  Top Layer w0.15: U9.11@-66.412,-77.638 ccw(c-66.805,-77.246) -66.25,-77.246 ccw(c-65.695,-77.246) U9.11@-66.088,-77.638 ; v1@-66.374,-75.734 cw(c-66.672,-76.032) -66.25,-76.032 cw(c-65.828,-76.032) v1@-66.126,-75.734 ; U9.11@-66.25,-78.512 v1@-66.25,-75.6 ; U8.2@-37.498,-21.842 v1(-35.9,-21.842) R51.1@-34.352,-21.842 ; U8.2@-36.894,-22.013 cw(c-36.48,-22.427) -36.48,-21.842 cw(c-36.48,-21.256) U8.2@-36.894,-21.67 ; v1@-36.024,-21.965 ccw(c-36.322,-22.264) -36.322,-21.842 ccw(c-36.322,-21.419) v1@-36.024,-21.718 ; v1@-35.776,-21.965 cw(c-35.478,-22.264) -35.478,-21.842 cw(c-35.478,-21.419) v1@-35.776,-21.718 ; -35.149,-21.842 cw(c-35.149,-22.723) R51.1@-34.526,-22.1 ; -34.948,-21.842 ccw(c-34.948,-21.246) R51.1@-34.526,-21.667 ; -34.787,-21.842 cw(c-34.787,-22.361) R51.1@-34.42,-21.994
  Bottom Layer w0.15: v1@-66.374,-75.486 ccw(c-66.672,-75.188) -66.25,-75.188 ccw(c-65.828,-75.188) v1@-66.126,-75.486 ; v1@-66.25,-75.6 -66.25,-71.45 ; -66.25,-71.6 -66.25,-57.301 -64.434,-55.486 -35.944,-55.486 -34.1,-53.641 -34.1,-22.093 -34.352,-21.842 v1(-35.9,-21.842) ; v1@-35.776,-21.965 cw(c-35.478,-22.264) -35.478,-21.842 cw(c-35.478,-21.419) v1@-35.776,-21.718
  other v1: -66.25,-75.61
NetR52_1: R52.1 U8.4 U9.10 | length 101
  Top Layer w0.15: U9.10@-65.142,-77.638 ccw(c-65.535,-77.246) -64.98,-77.246 ccw(c-64.425,-77.246) U9.10@-64.818,-77.638 ; v1@-65.104,-75.734 cw(c-65.402,-76.032) -64.98,-76.032 cw(c-64.558,-76.032) v1@-64.856,-75.734 ; U9.10@-64.98,-78.512 v1@-64.98,-75.6 ; U8.4@-37.498,-19.302 v1(-35.9,-19.302) R52.1@-34.328,-19.302 ; U8.4@-36.894,-19.473 cw(c-36.48,-19.887) -36.48,-19.302 cw(c-36.48,-18.716) U8.4@-36.894,-19.13 ; v1@-36.024,-19.425 ccw(c-36.322,-19.724) -36.322,-19.302 ccw(c-36.322,-18.879) v1@-36.024,-19.178 ; v1@-35.776,-19.425 cw(c-35.478,-19.724) -35.478,-19.302 cw(c-35.478,-18.879) v1@-35.776,-19.178 ; -35.093,-19.302 ccw(c-35.093,-18.501) R52.1@-34.526,-19.067 ; -35.005,-19.302 cw(c-35.005,-19.978) R52.1@-34.526,-19.5 ; -34.73,-19.302 ccw(c-34.73,-18.863) R52.1@-34.42,-19.173
  Bottom Layer w0.15: v1@-65.104,-75.486 ccw(c-65.402,-75.188) -64.98,-75.188 ccw(c-64.558,-75.188) v1@-64.856,-75.486 ; v1@-64.98,-75.6 -64.98,-63.99 ; -64.98,-64.4 -64.98,-57.38 -63.686,-56.086 -35.696,-56.086 -33.5,-53.89 -33.5,-19.7 -33.898,-19.302 v1(-35.9,-19.302) ; v1@-35.776,-19.425 cw(c-35.478,-19.724) -35.478,-19.302 cw(c-35.478,-18.879) v1@-35.776,-19.178
  other v1: -64.98,-75.61
NetR53_2: R53.2 U9.1 | length 9
  Top Layer w0.15: R53.2@-76.433,-87.869 ccw(c-76.955,-87.347) -76.217,-87.347 ccw(c-75.478,-87.347) R53.2@-76,-87.869 ; R53.2@-76.217,-88.086 -76.217,-85.217 -75.1,-84.1 U9.1@-72.6,-84.1 ; U9.1@-72.762,-84.262 ccw(c-73.155,-84.655) -73.155,-84.1 ccw(c-73.155,-83.545) U9.1@-72.762,-83.938
NGCS1: J2.18
NGCS2: J2.17
NGCS3: J2.19
NGCS5: J2.20
NLED_1: J2.68 LED1.2 | length 43.5
  Top Layer w0.15: LED1.2@-151.915,-80.11 -150.19,-80.11 -148.6,-81.7 -148.6,-86.3 -147.996,-86.904 -146.348,-86.904 J2.68@-145.703,-87.549 ; -146.349,-86.932 J2.68@-145.703,-87.577 ; LED1.2@-151.56,-80.4 cw(c-150.86,-81.1) -150.86,-80.11 ; LED1.2@-151.56,-80.4 cw(c-150.86,-81.1) -150.86,-80.11 ; LED1.2@-151.56,-80.4 cw(c-150.86,-81.1) -150.86,-80.11 ; LED1.2@-151.56,-80.4 cw(c-150.86,-81.1) -150.86,-80.11 ; LED1.2@-151.56,-80.4 cw(c-150.86,-81.1) -150.86,-80.11 ; LED1.2@-151.56,-79.82 ccw(c-150.86,-79.121) -150.86,-80.11 ; LED1.2@-151.56,-79.82 ccw(c-150.86,-79.121) -150.86,-80.11 ; LED1.2@-151.56,-79.82 ccw(c-150.86,-79.121) -150.86,-80.11 ; LED1.2@-151.56,-79.82 ccw(c-150.86,-79.121) -150.86,-80.11 ; LED1.2@-151.56,-79.82 ccw(c-150.86,-79.121) -150.86,-80.11 ; LED1.2@-151.454,-80.506 cw(c-150.498,-81.462) -150.498,-80.11 ; LED1.2@-151.454,-80.506 cw(c-150.498,-81.462) -150.498,-80.11 ; LED1.2@-151.454,-80.506 cw(c-150.498,-81.462) -150.498,-80.11 ; LED1.2@-151.454,-80.506 cw(c-150.498,-81.462) -150.498,-80.11 ; LED1.2@-151.454,-80.506 cw(c-150.498,-81.462) -150.498,-80.11 ; LED1.2@-151.454,-79.714 ccw(c-150.498,-78.758) -150.498,-80.11 ; LED1.2@-151.454,-79.714 ccw(c-150.498,-78.758) -150.498,-80.11 ; LED1.2@-151.454,-79.714 ccw(c-150.498,-78.758) -150.498,-80.11 ; LED1.2@-151.454,-79.714 ccw(c-150.498,-78.758) -150.498,-80.11 ; LED1.2@-151.454,-79.714 ccw(c-150.498,-78.758) -150.498,-80.11 ; -146.258,-87.023 cw(c-146.812,-87.577) J2.68@-146.028,-87.577 ; -146.258,-87.023 ccw(c-145.703,-86.468) J2.68@-145.703,-87.252 ; -146.258,-87.023 cw(c-146.812,-87.577) J2.68@-146.028,-87.577 ; -146.258,-87.023 ccw(c-145.703,-86.468) J2.68@-145.703,-87.252 ; -146.258,-87.023 cw(c-146.812,-87.577) J2.68@-146.028,-87.577 ; -146.258,-87.023 ccw(c-145.703,-86.468) J2.68@-145.703,-87.252 ; J2.68@-146.078,-87.549 ccw(c-146.915,-87.549) -146.323,-86.957 cw(c-146.915,-87.549) J2.68@-146.078,-87.549 ; J2.68@-146.078,-87.549 ccw(c-146.983,-87.549) -146.343,-86.909 cw(c-146.983,-87.549) J2.68@-146.078,-87.549 ; J2.68@-146.002,-87.279 cw(c-146.3,-87.577) J2.68@-145.878,-87.577 ; J2.68@-146.002,-87.279 ccw(c-145.703,-86.98) J2.68@-145.703,-87.402 ; J2.68@-146.002,-87.279 cw(c-146.3,-87.577) J2.68@-145.878,-87.577 ; J2.68@-146.002,-87.279 ccw(c-145.703,-86.98) J2.68@-145.703,-87.402 ; J2.68@-146.002,-87.279 cw(c-146.3,-87.577) J2.68@-145.878,-87.577 ; J2.68@-146.002,-87.279 ccw(c-145.703,-86.98) J2.68@-145.703,-87.402 ; J2.68@-145.928,-87.549 ccw(c-146.403,-87.549) -146.067,-87.213 cw(c-146.403,-87.549) J2.68@-145.928,-87.549 ; J2.68@-145.928,-87.549 ccw(c-146.471,-87.549) -146.087,-87.165 cw(c-146.471,-87.549) J2.68@-145.928,-87.549 ; J2.68@-145.753,-87.224 cw(c-145.753,-86.493) -146.27,-87.01 ccw(c-145.753,-86.493) J2.68@-145.753,-87.224 ; J2.68@-145.753,-87.224 cw(c-145.753,-86.56) -146.222,-87.03 ccw(c-145.753,-86.56) J2.68@-145.753,-87.224
NLED_2: J2.70 LED2.2 | length 42.3
  Top Layer w0.15: LED2.2@-151.915,-82.571 -150.329,-82.571 -149.4,-83.5 -149.4,-87 -148.206,-88.194 -146.328,-88.194 J2.70@-145.703,-88.819 ; -146.328,-88.223 J2.70@-145.703,-88.848 ; LED2.2@-151.56,-82.861 cw(c-150.86,-83.561) -150.86,-82.571 ; LED2.2@-151.56,-82.861 cw(c-150.86,-83.561) -150.86,-82.571 ; LED2.2@-151.56,-82.861 cw(c-150.86,-83.561) -150.86,-82.571 ; LED2.2@-151.56,-82.861 cw(c-150.86,-83.561) -150.86,-82.571 ; LED2.2@-151.56,-82.861 cw(c-150.86,-83.561) -150.86,-82.571 ; LED2.2@-151.56,-82.281 ccw(c-150.86,-81.581) -150.86,-82.571 ; LED2.2@-151.56,-82.281 ccw(c-150.86,-81.581) -150.86,-82.571 ; LED2.2@-151.56,-82.281 ccw(c-150.86,-81.581) -150.86,-82.571 ; LED2.2@-151.56,-82.281 ccw(c-150.86,-81.581) -150.86,-82.571 ; LED2.2@-151.56,-82.281 ccw(c-150.86,-81.581) -150.86,-82.571 ; LED2.2@-151.454,-82.967 cw(c-150.498,-83.923) -150.498,-82.571 ; LED2.2@-151.454,-82.967 cw(c-150.498,-83.923) -150.498,-82.571 ; LED2.2@-151.454,-82.967 cw(c-150.498,-83.923) -150.498,-82.571 ; LED2.2@-151.454,-82.967 cw(c-150.498,-83.923) -150.498,-82.571 ; LED2.2@-151.454,-82.967 cw(c-150.498,-83.923) -150.498,-82.571 ; LED2.2@-151.454,-82.175 ccw(c-150.498,-81.219) -150.498,-82.571 ; LED2.2@-151.454,-82.175 ccw(c-150.498,-81.219) -150.498,-82.571 ; LED2.2@-151.454,-82.175 ccw(c-150.498,-81.219) -150.498,-82.571 ; LED2.2@-151.454,-82.175 ccw(c-150.498,-81.219) -150.498,-82.571 ; LED2.2@-151.454,-82.175 ccw(c-150.498,-81.219) -150.498,-82.571 ; -146.258,-88.293 cw(c-146.812,-88.848) J2.70@-146.028,-88.848 ; -146.258,-88.293 ccw(c-145.703,-87.739) J2.70@-145.703,-88.523 ; -146.258,-88.293 cw(c-146.812,-88.848) J2.70@-146.028,-88.848 ; -146.258,-88.293 ccw(c-145.703,-87.739) J2.70@-145.703,-88.523 ; -146.258,-88.293 cw(c-146.812,-88.848) J2.70@-146.028,-88.848 ; -146.258,-88.293 ccw(c-145.703,-87.739) J2.70@-145.703,-88.523 ; J2.70@-146.078,-88.819 ccw(c-146.913,-88.819) -146.322,-88.229 cw(c-146.913,-88.819) J2.70@-146.078,-88.819 ; J2.70@-146.078,-88.819 ccw(c-146.983,-88.819) -146.343,-88.179 cw(c-146.983,-88.819) J2.70@-146.078,-88.819 ; J2.70@-146.002,-88.55 cw(c-146.3,-88.848) J2.70@-145.878,-88.848 ; J2.70@-146.002,-88.55 ccw(c-145.703,-88.251) J2.70@-145.703,-88.673 ; J2.70@-146.002,-88.55 cw(c-146.3,-88.848) J2.70@-145.878,-88.848 ; J2.70@-146.002,-88.55 ccw(c-145.703,-88.251) J2.70@-145.703,-88.673 ; J2.70@-146.002,-88.55 cw(c-146.3,-88.848) J2.70@-145.878,-88.848 ; J2.70@-146.002,-88.55 ccw(c-145.703,-88.251) J2.70@-145.703,-88.673 ; J2.70@-145.928,-88.819 ccw(c-146.401,-88.819) -146.066,-88.485 cw(c-146.401,-88.819) J2.70@-145.928,-88.819 ; J2.70@-145.928,-88.819 ccw(c-146.471,-88.819) -146.087,-88.435 cw(c-146.471,-88.819) J2.70@-145.928,-88.819 ; J2.70@-145.753,-88.494 cw(c-145.753,-87.76) -146.272,-88.279 ccw(c-145.753,-87.76) J2.70@-145.753,-88.494 ; J2.70@-145.753,-88.494 cw(c-145.753,-87.83) -146.222,-88.3 ccw(c-145.753,-87.83) J2.70@-145.753,-88.494
NLED_3: J2.72 LED3.2 | length 35.7
  Top Layer w0.15: LED3.2@-151.915,-85.031 -150.769,-85.031 ; J2.72@-145.703,-90.119 -146.322,-89.5 ; J2.72@-145.703,-90.089 -146.328,-89.464 -149.136,-89.464 -150,-88.6 -150,-85.8 -150.769,-85.031 ; LED3.2@-151.515,-85.268 cw(c-151.058,-85.591) -151.058,-85.031 ; LED3.2@-151.515,-85.268 cw(c-151.058,-85.591) -151.058,-85.031 ; LED3.2@-151.515,-85.268 cw(c-151.058,-85.591) -151.058,-85.031 ; LED3.2@-151.515,-85.268 cw(c-151.058,-85.591) -151.058,-85.031 ; LED3.2@-151.515,-85.268 cw(c-151.058,-85.591) -151.058,-85.031 ; LED3.2@-151.515,-84.795 ccw(c-151.058,-84.472) -151.058,-85.031 ; LED3.2@-151.515,-84.795 ccw(c-151.058,-84.472) -151.058,-85.031 ; LED3.2@-151.515,-84.795 ccw(c-151.058,-84.472) -151.058,-85.031 ; LED3.2@-151.515,-84.795 ccw(c-151.058,-84.472) -151.058,-85.031 ; LED3.2@-151.515,-84.795 ccw(c-151.058,-84.472) -151.058,-85.031 ; LED3.2@-151.392,-85.355 cw(c-150.769,-85.795) -150.769,-85.031 ; LED3.2@-151.392,-85.355 cw(c-150.769,-85.795) -150.769,-85.031 ; LED3.2@-151.392,-85.355 cw(c-150.769,-85.795) -150.769,-85.031 ; LED3.2@-151.392,-85.355 cw(c-150.769,-85.795) -150.769,-85.031 ; LED3.2@-151.392,-85.355 cw(c-150.769,-85.795) -150.769,-85.031 ; LED3.2@-151.392,-84.708 ccw(c-150.769,-84.268) -150.769,-85.031 ; LED3.2@-151.392,-84.708 ccw(c-150.769,-84.268) -150.769,-85.031 ; LED3.2@-151.392,-84.708 ccw(c-150.769,-84.268) -150.769,-85.031 ; LED3.2@-151.392,-84.708 ccw(c-150.769,-84.268) -150.769,-85.031 ; LED3.2@-151.392,-84.708 ccw(c-150.769,-84.268) -150.769,-85.031 ; -146.322,-89.5 cw(c-146.911,-90.089) J2.72@-146.078,-90.089 ; -146.322,-89.5 cw(c-146.911,-90.089) J2.72@-146.078,-90.089 ; -146.258,-89.564 cw(c-146.812,-90.119) J2.72@-146.028,-90.119 ; -146.258,-89.564 ccw(c-145.703,-89.01) J2.72@-145.703,-89.794 ; -146.258,-89.564 cw(c-146.812,-90.119) J2.72@-146.028,-90.119 ; -146.258,-89.564 ccw(c-145.703,-89.01) J2.72@-145.703,-89.794 ; -146.258,-89.564 cw(c-146.812,-90.119) J2.72@-146.028,-90.119 ; -146.258,-89.564 ccw(c-145.703,-89.01) J2.72@-145.703,-89.794 ; J2.72@-146.078,-90.089 ccw(c-146.983,-90.089) -146.343,-89.449 cw(c-146.983,-90.089) J2.72@-146.078,-90.089 ; J2.72@-146.002,-89.82 cw(c-146.3,-90.119) J2.72@-145.878,-90.119 ; J2.72@-146.002,-89.82 ccw(c-145.703,-89.522) J2.72@-145.703,-89.944 ; J2.72@-146.002,-89.82 cw(c-146.3,-90.119) J2.72@-145.878,-90.119 ; J2.72@-146.002,-89.82 ccw(c-145.703,-89.522) J2.72@-145.703,-89.944 ; J2.72@-146.002,-89.82 cw(c-146.3,-90.119) J2.72@-145.878,-90.119 ; J2.72@-146.002,-89.82 ccw(c-145.703,-89.522) J2.72@-145.703,-89.944 ; J2.72@-145.928,-90.089 ccw(c-146.399,-90.089) -146.066,-89.756 cw(c-146.399,-90.089) J2.72@-145.928,-90.089 ; J2.72@-145.928,-90.089 ccw(c-146.471,-90.089) -146.087,-89.705 cw(c-146.471,-90.089) J2.72@-145.928,-90.089 ; J2.72@-145.753,-89.764 cw(c-145.753,-89.028) -146.273,-89.549 ccw(c-145.753,-89.028) J2.72@-145.753,-89.764 ; J2.72@-145.753,-89.764 cw(c-145.753,-89.1) -146.222,-89.57 ccw(c-145.753,-89.1) J2.72@-145.753,-89.764
NLED_4: J2.71 LED4.2 | length 37.2
  Top Layer w0.15: LED4.2@-151.906,-87.492 -151.906,-89.659 -151.446,-90.119 J2.71@-146.973,-90.119 ; LED4.2@-152.311,-87.888 cw(c-153.288,-88.865) -151.906,-88.865 ; LED4.2@-152.311,-87.888 cw(c-153.288,-88.865) -151.906,-88.865 ; LED4.2@-152.311,-87.888 cw(c-153.288,-88.865) -151.906,-88.865 ; LED4.2@-152.311,-87.888 cw(c-153.288,-88.865) -151.906,-88.865 ; LED4.2@-152.311,-87.888 cw(c-153.288,-88.865) -151.906,-88.865 ; LED4.2@-152.205,-87.782 cw(c-152.926,-88.503) -151.906,-88.503 ; LED4.2@-152.205,-87.782 cw(c-152.926,-88.503) -151.906,-88.503 ; LED4.2@-152.205,-87.782 cw(c-152.926,-88.503) -151.906,-88.503 ; LED4.2@-152.205,-87.782 cw(c-152.926,-88.503) -151.906,-88.503 ; LED4.2@-152.205,-87.782 cw(c-152.926,-88.503) -151.906,-88.503 ; LED4.2@-152.099,-87.676 cw(c-152.564,-88.141) -151.906,-88.141 ; LED4.2@-152.099,-87.676 cw(c-152.564,-88.141) -151.906,-88.141 ; LED4.2@-152.099,-87.676 cw(c-152.564,-88.141) -151.906,-88.141 ; LED4.2@-152.099,-87.676 cw(c-152.564,-88.141) -151.906,-88.141 ; LED4.2@-152.099,-87.676 cw(c-152.564,-88.141) -151.906,-88.141 ; -151.906,-88.823 cw(c-150.584,-88.823) LED4.2@-151.519,-87.888 ; -151.906,-88.823 cw(c-150.584,-88.823) LED4.2@-151.519,-87.888 ; -151.906,-88.823 cw(c-150.584,-88.823) LED4.2@-151.519,-87.888 ; -151.906,-88.823 cw(c-150.584,-88.823) LED4.2@-151.519,-87.888 ; -151.906,-88.823 cw(c-150.584,-88.823) LED4.2@-151.519,-87.888 ; -151.906,-88.461 cw(c-150.946,-88.461) LED4.2@-151.625,-87.782 ; -151.906,-88.461 cw(c-150.946,-88.461) LED4.2@-151.625,-87.782 ; -151.906,-88.461 cw(c-150.946,-88.461) LED4.2@-151.625,-87.782 ; -151.906,-88.461 cw(c-150.946,-88.461) LED4.2@-151.625,-87.782 ; -151.906,-88.461 cw(c-150.946,-88.461) LED4.2@-151.625,-87.782 ; -147.757,-90.119 cw(c-147.757,-90.904) J2.71@-147.203,-90.349 ; -147.757,-90.119 ccw(c-147.757,-89.335) J2.71@-147.203,-89.889 ; -147.757,-90.119 cw(c-147.757,-90.904) J2.71@-147.203,-90.349 ; -147.757,-90.119 ccw(c-147.757,-89.335) J2.71@-147.203,-89.889 ; -147.757,-90.119 cw(c-147.757,-90.904) J2.71@-147.203,-90.349 ; -147.757,-90.119 ccw(c-147.757,-89.335) J2.71@-147.203,-89.889 ; J2.71@-147.395,-90.119 cw(c-147.395,-90.542) J2.71@-147.097,-90.243 ; J2.71@-147.395,-90.119 ccw(c-147.395,-89.697) J2.71@-147.097,-89.995 ; J2.71@-147.395,-90.119 cw(c-147.395,-90.542) J2.71@-147.097,-90.243 ; J2.71@-147.395,-90.119 ccw(c-147.395,-89.697) J2.71@-147.097,-89.995 ; J2.71@-147.395,-90.119 cw(c-147.395,-90.542) J2.71@-147.097,-90.243 ; J2.71@-147.395,-90.119 ccw(c-147.395,-89.697) J2.71@-147.097,-89.995 ; -147.879,-90.119 ccw(c-147.879,-89.233) -147.253,-89.859 cw(c-147.879,-89.233) -147.879,-90.119 ; -147.735,-90.119 cw(c-147.735,-90.802) -147.253,-90.319 ccw(c-147.735,-90.802) -147.735,-90.119 ; -147.517,-90.119 ccw(c-147.517,-89.595) -147.147,-89.966 cw(c-147.517,-89.595) -147.517,-90.119